# Altium PCB hat_template 2020V3.PcbDoc (part 1 of 2)
Units mm, origin at the board's own origin, x right, y up, seen from the top; angles counter-clockwise.
Board outline 64 x 85 mm, 4 copper layers (Top Side, Ground Plane, Power Plane, Bottom Side), stack 0.844 mm thick; 139 components, 78 nets, 419 pads, 123 vias.
Unrouted connection lines stored in the file: 3.
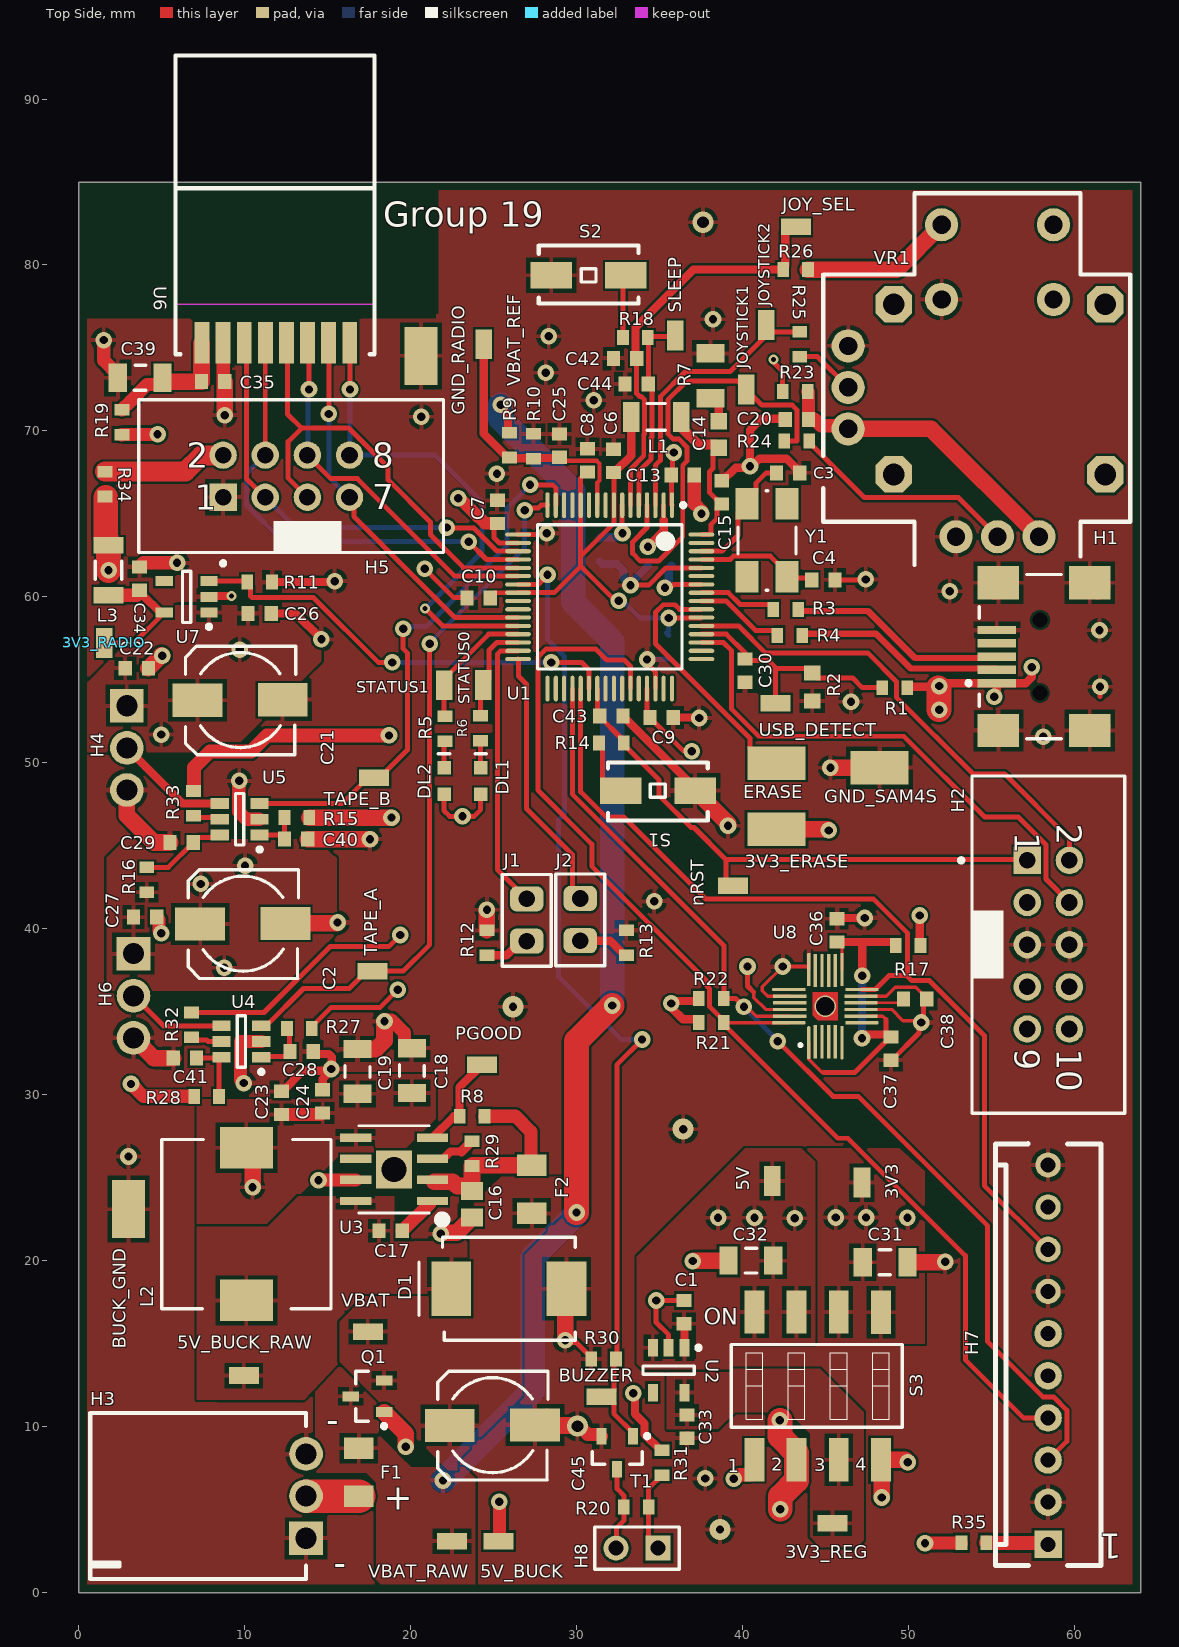
[diagram p0: Top Side view]
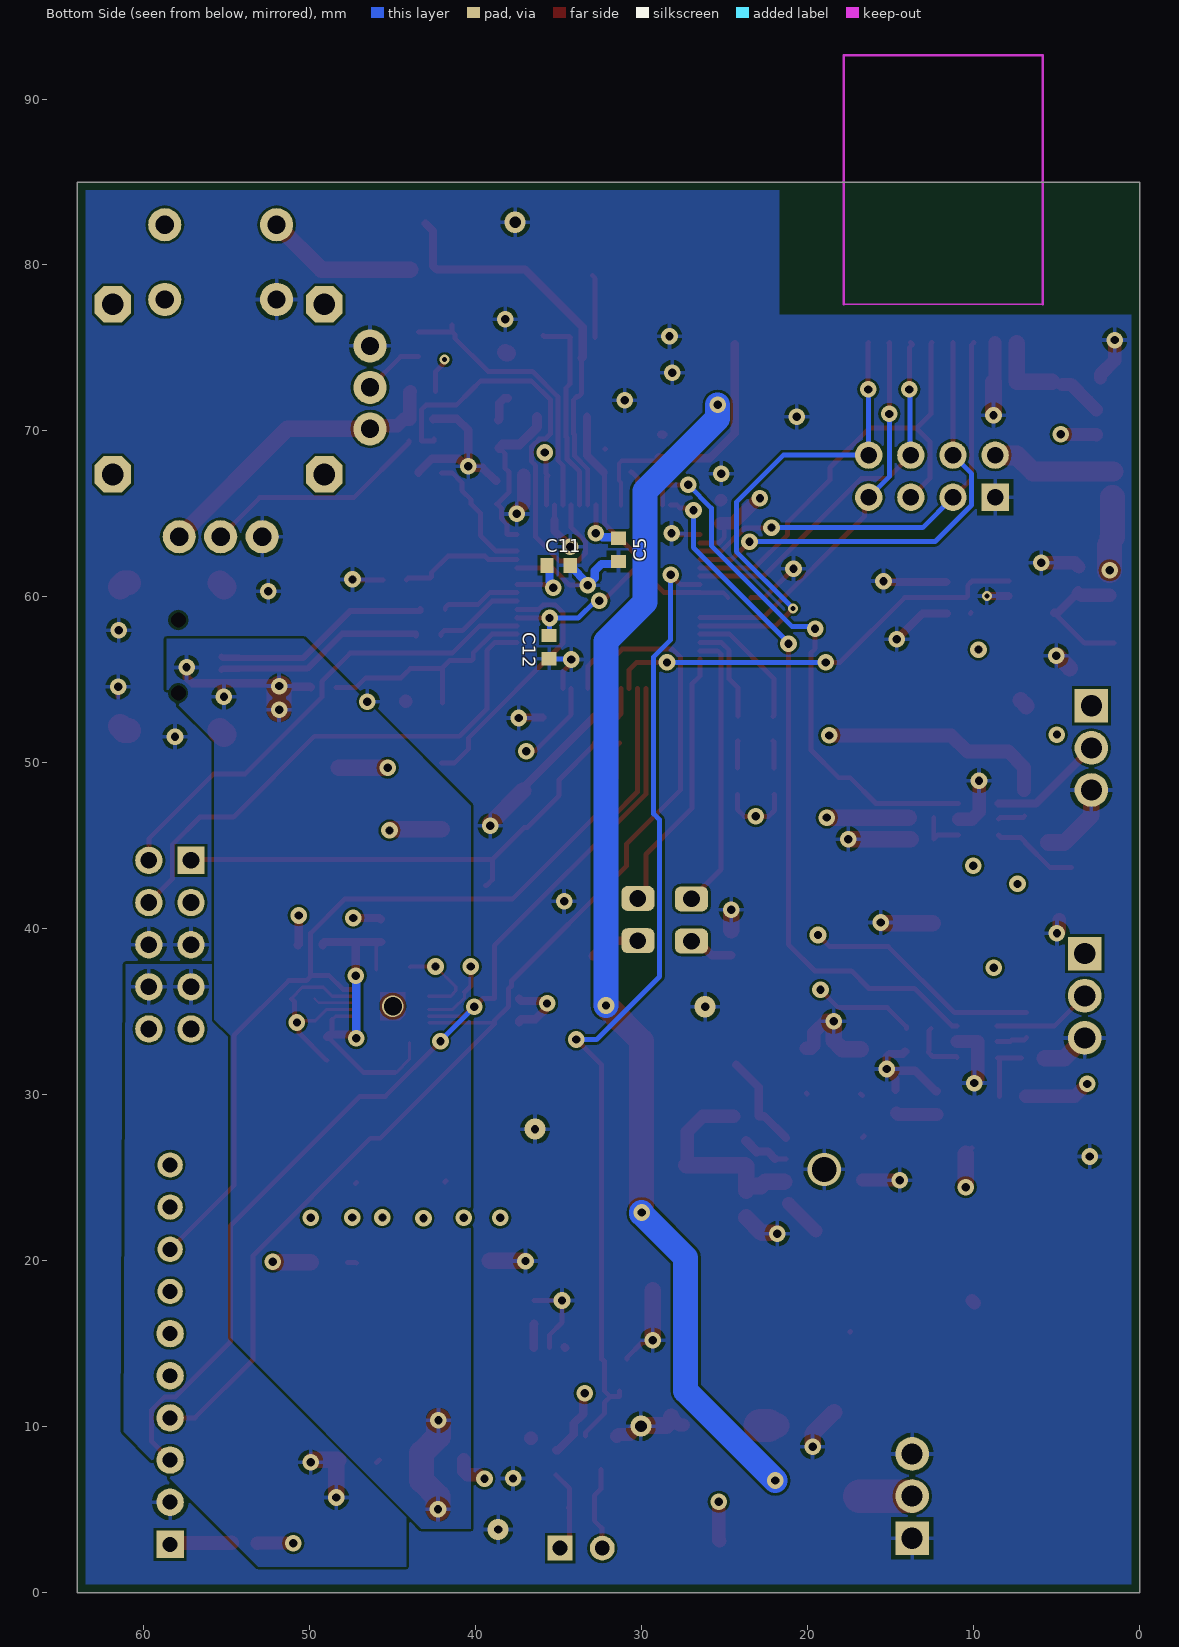
[diagram p1: Bottom Side view, seen from below]
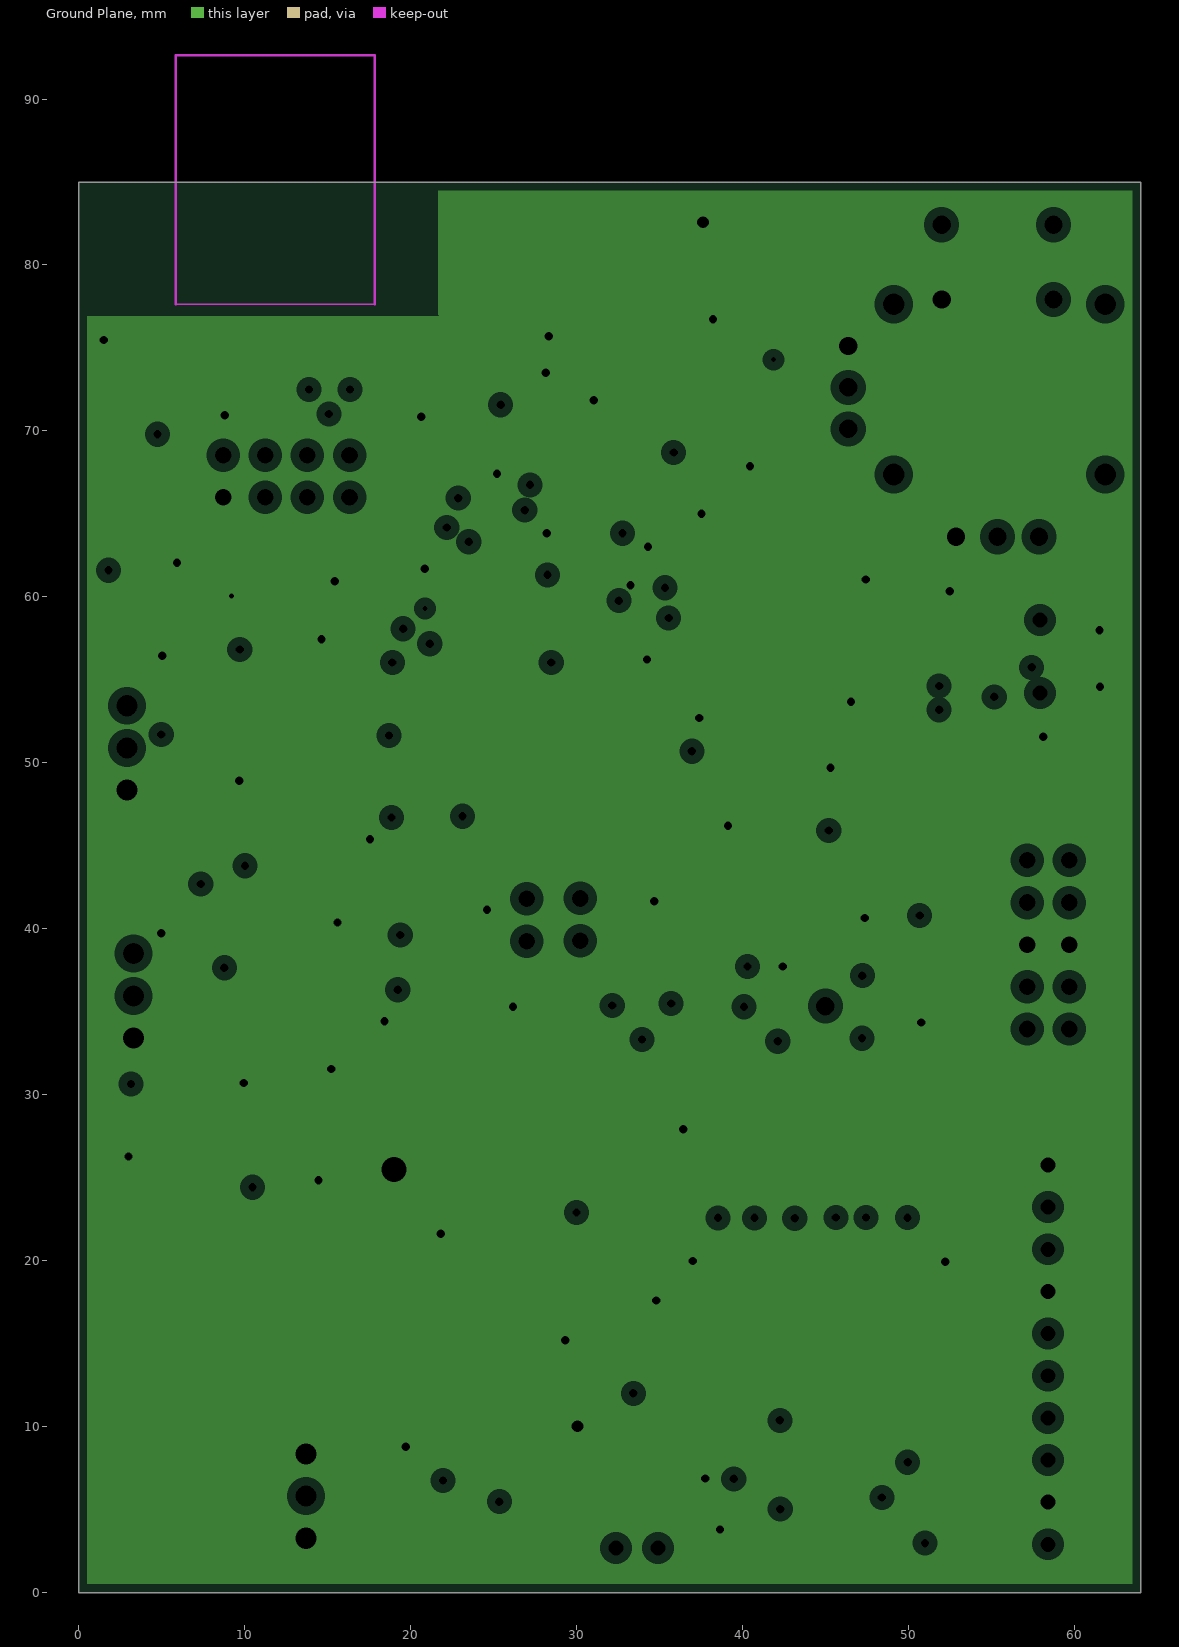
[diagram p2: Ground Plane, clearances drawn from the general rule]
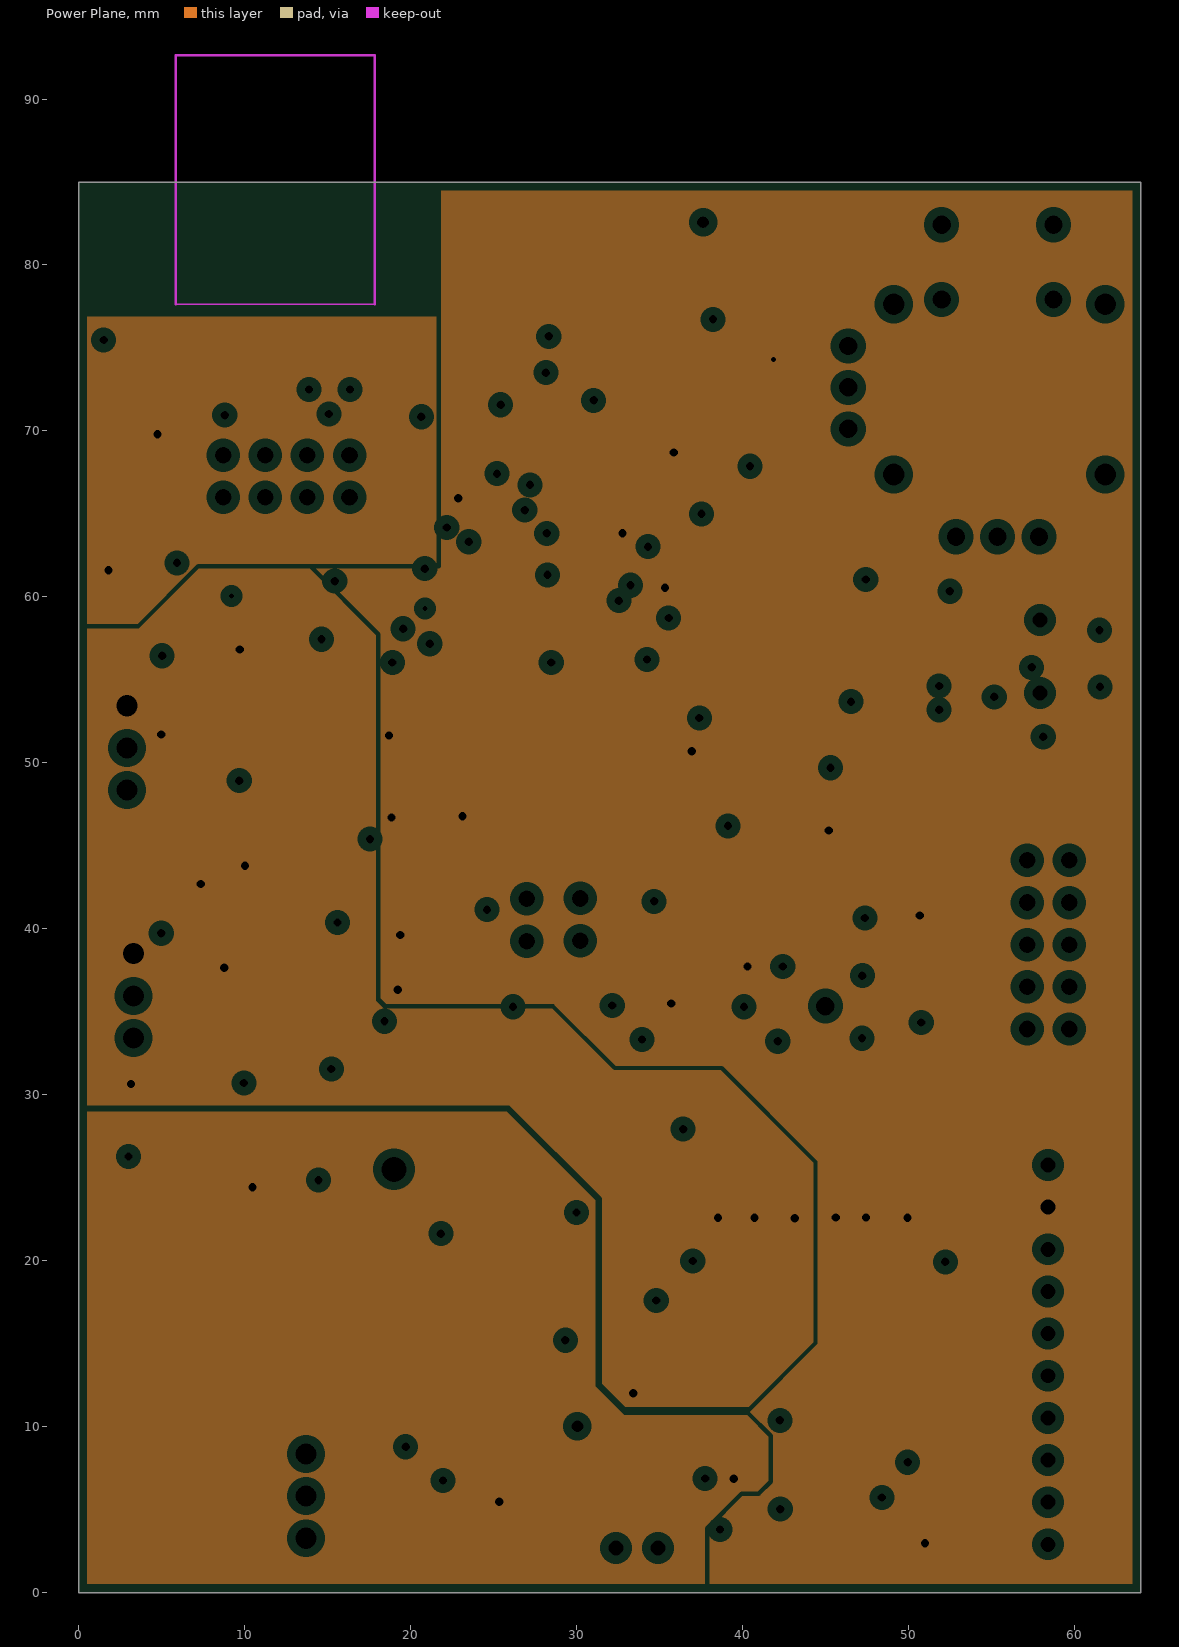
[diagram p3: Power Plane, clearances drawn from the general rule]

## Layer stack, top to bottom
Top Solder: solder mask 0.0102, Solder Resist, Dk 3.5
Top Side: signal copper 0.0356
Dielectric 1: core 0.32, FR-4, Dk 4.8
Ground Plane: plane copper 0.036, net GND
Dielectric 3: prepreg 0.127, Dk 4.2
Power Plane: plane copper 0.036, net (Multiple Nets)
Dielectric 4: core 0.254, Dk 4.2
Bottom Side: signal copper 0.0356
Bottom Solder: solder mask 0.0102, Solder Resist, Dk 3.5

## Board outline
0,85 64,85 64,0 0,0 0,85

## Design rules (kind name [scope] priority, off if disabled: settings)
BoardOutlineClearance [All] p1: gap=0.5 ignorepadtopadclearanceinfootprint=FALSE
Clearance Min_Clearance_Circuit_Labs [All] p1: gap=0.15 ignorepadtopadclearanceinfootprint=FALSE except(0: Arc-Hole Track-Hole SMDPad-Hole THPad-Hole Via-Hole Fill-Hole Poly-Hole Region-Hole Text-Hole)
DiffPairsRouting [All] p1: maxlimit=0.254 minlimit=0.254 mostfreqgap=0.254 toplayer_minwidth=0.381 toplayer_maxwidth=0.381 toplayer_prefwidth=0.381 bottomlayer_minwidth=0.381 bottomlayer_maxwidth=0.381 bottomlayer_prefwidth=0.381 maxuncoupledlength=12.7
FanoutControl Fanout_BGA [IsBGA] p1 off: bgadir=Out bgaviamode=Centered fanoutstyle=Auto fanoutdirection=Alternating viagrid=0.025 // Fanout_BGA (Default Rule)
HoleSize [All] p1: absolutevalues=TRUE maxlimit=10 minlimit=0.3 maxpercent=80.000 minpercent=20.000
MinimumAnnularRing [All] p1: minimumring=0.1
MinimumSolderMaskSliver [All] p1: minsoldermaskwidth=0.1
NetAntennae [All] p1: netantennaetolerance=1
PasteMaskExpansion [All] p1 off: expansion=0.2
PlaneClearance [All] p1: clearance=0.508
PlaneConnect [All] p1: planeconnectstyle=Relief reliefexpansion=0.508 reliefentries=4 reliefconductorwidth=0.254 reliefairgap=0.254
PolygonConnect [All] p1: connectstyle=Relief reliefconductorwidth=0.254 reliefentries=4 polygonreliefangle="90 Angle" airgapwidth=0.254
RoutingVias [All] p1: holewidth=0.5 width=1 viastyle="Through Hole" minholewidth=0.3 minwidth=0.6 maxholewidth=1 maxwidth=2
SMDNeckDown [All] p1 off: percent=50.000
SMDToCorner [All] p1: distance=98425
SMDToPlane [All] p1: distance=1968504
SilkToSolderMaskClearance SilkscreenOverComponentPads [IsPad] p1: minsilkscreentomaskgap=0.254 clearancetoexposedcopper=TRUE
SolderMaskExpansion [All] p1: expansion=0.102
ViasUnderSMD [All] p1: allowed=FALSE
Width [All] p1: maxlimit=2 minlimit=0.15 preferedwidth=0.3
21 further rules are at their usual default settings.

## Classes and differential pairs
component class U_SAM4S_MCU_Hat: 3V3_ERASE C2 C3 C4 C5 C6 C7 C8 C9 C10 C11 C12 C13 C14 C15 C21 C22 C25 C27 C28 C29 C30 C40 C41 C43 C44 DL1 DL2 ERASE GND_SAM4S H1 H2 H4 H6 J1 J2 L1 nRST R1 R2 R3 R4 R5 R6 R7 R9 R10 R12 R13 R14 R15 R16 R18 R27 R28 R32 R33 S1 S2 SLEEP STATUS0 STATUS1 TAPE_A TAPE_B U1 U4 U5 USB_DETECT VBAT_REF Y1
component class U_Radio: C35 C39 GND_RADIO H5 R19 R34
component class U_Joystick: C20 C42 JOY_SEL JOYSTICK1 JOYSTICK2 R23 R24 R25 R26 VR1
component class U_IMU_MPU-9250: C36 C37 C38 H7 R17 R21 R22 R35 U8
component class U_Buzzer: BUZZER H8 R20 R30 R31 T1
component class U_Battery_and_Power: 3V3 3V3_REG 5V 5V_BUCK 5V_BUCK_RAW BUCK_GND C1 C16 C17 C18 C19 C23 C24 C26 C31 C32 C33 C34 C45 D1 F1 F2 H3 L2 L3 PGOOD Q1 R8 R11 R29 S3 U2 U3 U7 VBAT VBAT_RAW
differential pair D: +D_P -D_N

## Components (designator, comment, footprint, x,y, rotation, side; value= is the part's Value field where it differs from the comment)
3V3 "TP_0603" TP_0603 47.2,24.7 r90 top
3V3_ERASE "3V3" TP_1206 42.05,46 r180 top value=TP
3V3_RADIO "TP_0603" TP_0603 1.55,57.225 r90 top
3V3_REG "TP_0603" TP_0603 45.425,4.175 r0 top
5V "TP_0603" TP_0603 41.8,24.8 r90 top
5V_BUCK "TP_0603" TP_0603 25.3,3.1 r0 top
5V_BUCK_RAW "TP_0603" TP_0603 9.95,13.075 r180 top
BUCK_GND "TP" TP_1206 3,23.1 r90 top
BUZZER "TP_0603" TP_0603 31.5,11.8 r0 top
C1 "1uF" CAPC1608L 36.475,16.9 r270 top
C2 "100uF/16V" NICH-1 9.9,40.3 r180 top
C3 "27pF" CAPC1608L 42.75,67.475 r180 top
C4 "27pF" CAPC1608L 44.875,61.025 r180 top
C5 "100nF" CAPC1608L 31.4,62.825 r90 bottom
C6 "100nF" CAPC1608L 32.225,68.2 r90 top
C7 "100nF" CAPC1608L 25.225,65.125 r270 top
C8 "100nF" CAPC1608L 30.65,68.225 r90 top
C9 "100nF" CAPC1608L 35.125,52.725 r180 top
C10 "100nF" CAPC1608L 24.1,59.925 r180 top
C11 "100nF" CAPC1608L 35,61.9 r0 bottom
C12 "100nF" CAPC1608L 35.575,56.975 r270 bottom
C13 "100nF" CAPC1608L 36.4,67.35 r180 top
C14 "4.7uF" CAPC1608N 38.575,69.775 r270 top
C15 "100nF" CAPC1608L 38.75,66.3 r90 top
C16 "10uF" CAPC2012L 23.7,23.4 r90 top
C17 "100nF" CAPC1608L 18.8,21.8 r180 top
C18 "22uF" CAPC3216L 20.075,31.45 r270 top
C19 "22uF" CAPC3216L 16.8,31.4 r270 top
C20 "100nF" CAPC1608L 43.275,70.7 r0 top
C21 "100uF/16V" NICH-1 9.739,53.778 r180 top
C22 "100nF" CAPC1608L 3.5,55.7 r180 top
C23 "100nF" CAPC1608L 12.225,29.5 r270 top
C24 "10nF" CAPC1608L 14.7,29.6 r270 top
C25 "100nF" CAPC1608L 28.973,69.113 r270 top
C26 "1uF" CAPC1608L 10.9,59 r180 top
C27 "100nF" CAPC1608L 4,40.7 r180 top
C28 "100nF" CAPC1608L 13.425,32.6 r180 top
C29 "100nF" CAPC1608L 6.2,45.2 r0 top
C30 "100nF" CAPC1608L 40.15,55.55 r90 top
C31 "22uF" CAPC3216L 48.6,19.9 r180 top
C32 "22uF" CAPC3216L 40.5,20 r0 top
C33 "2.2uF" CAPC1608L 36.65,10 r90 top
C34 "2.2uF" CAPC1608L 3.65,61.1 r270 top
C35 "100nF" CAPC1608L 8.1,72.975 r180 top
C36 "100nF" CAPC1608L 45.7,39.9 r90 top
C37 "10nF" CAPC1608L 48.95,32.775 r270 top
C38 "100nF" CAPC1608L 50.4,35.775 r180 top
C39 "22uF" CAPC3216L 3.7,73.2 r0 top
C40 "100nF" CAPC1608L 13.1,45.4 r180 top
C41 "100nF" CAPC1608L 6.4,32.2 r0 top
C42 "100nF" CAPC1608L 32.925,74.375 r0 top
C43 "100nF" CAPC1608L 32.1,52.825 r180 top
C44 "100nF" CAPC1608L 33.625,72.825 r0 top
C45 "100uF/16V" NICH-1 24.939,10.078 r180 top
D1 "#NAME?" SMC 25.925,18.3 r180 top
DL1 "#NAME?" WL-SMCW0603 24.225,49.7 r270 top
DL2 "#NAME?" WL-SMCW0603 22.025,49.7 r270 top
ERASE "Erase" TP_1206 42.05,49.975 r0 top value=TP
F1 "10A" RESC3216N 16.875,7.25 r90 top
F2 "2A" RESC3216N 27.3,24.3 r90 top
GND_RADIO "TP" TP_1206 20.625,74.525 r270 top
GND_SAM4S "TP" TP_1206 48.25,49.7 r180 top
H1 "JS_USB_MINI_B" USB/SM0.8-6H5 63.175,56.4 r0 top
H2 "Header 5X2 Vert" IDC2.54-V10D 58.43,39.04 r270 top
H3 "Battery_HEADER_3pin" BATT_HEADER_3POS 13.7,5.81 r90 top
H4 "HEADER_3" HEADER_3POS 2.9,50.9 r270 top
H5 "JA_HDR_IDC_4x2_VERT" IDC2.54-V08D 13.78,67.27 r0 top
H6 "HEADER_3" HEADER_3POS 3.3,35.96 r270 top
H7 "External IMU" MOLEX_KK_10_HDR 58.417,2.904 r90 top
H8 "Header 2" HDR1X2 34.915,2.675 r180 top
J1 "100Mil Jumper" JMP2.54 27,41.8 r270 top
J2 "100Mil Jumper" JMP2.54 30.225,41.825 r270 top
JOY_SEL "TP_0603" TP_0603 43.225,82.3 r0 top
JOYSTICK1 "TP_0603" TP_0603 40.225,72.5 r270 top
JOYSTICK2 "TP_0603" TP_0603 41.425,76.375 r90 top
L1 "1A max, Idc 0.3R," INDC3216L 34.8,70.85 r180 top
L2 "IND 5.2UH 6A" INDUCTOR5u2 10.1,22.2 r90 top
L3 "1A max, Idc 0.3R" INDC3216L 1.8,61.6 r90 top
nRST "TP_0603" TP_0603 39.425,42.6 r180 top
PGOOD "TP_0603" TP_0603 24.3,31.8 r0 top
Q1 "#NAME?" SOT23_L 17.4,11.825 r180 top
R1 "27K" RESC1608L 49.175,54.525 r0 top
R2 "47K" RESC1608N 44.2,54.575 r90 top
R3 "27R" RESC1608L 42.6,59.25 r180 top
R4 "27R" RESC1608L 42.85,57.675 r180 top
R5 "1K" RESC1608L 22.075,52.05 r270 top
R6 "1K6" RESC1608L 24.2,52.075 r270 top
R7 "1R" RESC3216L 38.075,73.325 r270 top
R8 "100K" RESC1608L 23.7,28.7 r0 top
R9 "16K" RESC1608L 25.95,69.15 r90 top
R10 "10K" RESC1608L 27.4,69.069 r270 top
R11 "10K" RESC1608L 10.9,60.9 r180 top
R12 "3K" RESC1608L 24.6,39.15 r90 top
R13 "3K" RESC1608L 33,39.15 r90 top
R14 "3K" RESC1608L 32.1,51.2 r180 top
R15 "0R" RESC1608L 13.15,46.7 r180 top
R16 "0R" RESC1608L 4.1,42.95 r270 top
R17 "0R" RESC1608L 49.975,39 r0 top
R18 "3K" RESC1608L 33.55,75.625 r180 top
R19 "0R" RESC1608L 2.6,70.525 r270 top
R20 "1K" RESC1608L 33.6,5.15 r0 top
R21 "4K7" RESC1608L 38.125,34.35 r180 top
R22 "4K7" RESC1608L 38.125,35.8 r180 top
R23 "0R" RESC1608L 43.175,72.375 r180 top
R24 "3K" RESC1608L 43.275,69.4 r0 top
R25 "3K" RESC1608L 43.45,75.225 r90 top
R26 "3K" RESC1608L 43.2,79.725 r0 top
R27 "0R" RESC1608L 13.3,34 r180 top
R28 "0R" RESC1608L 7.7,29.9 r180 top
R29 "0R" RESC1608L 23.7,26.45 r270 top
R30 "4K7" RESC1608L 31.625,14.075 r0 top
R31 "0R" RESC1608L 35.15,7.825 r270 top
R32 "0R" RESC1608L 6.8,34.2 r90 top
R33 "0R" RESC1608L 6.925,47.55 r90 top
R34 "0R" RESC1608L 1.575,66.8 r270 top
R35 "0R" RESC1608L 53.95,3 r180 top
S1 "EVQPNF05M" EVQPNF05M 34.9,48.325 r180 top
S2 "EVQPNF05M" EVQPNF05M 30.725,79.375 r0 top
S3 "WS_SW DIP-4" "DIP_SW_4WAY_SMD -" 40.72,8 r0 top
SLEEP "TP_0603" TP_0603 35.95,75.75 r90 top
STATUS0 "TP_0603" TP_0603 24.375,54.7 r90 top
STATUS1 "TP_0603" TP_0603 22.025,54.675 r90 top
T1 "#NAME?" SOT23_L 32.45,8.425 r270 top
TAPE_A "TP_0603" TP_0603 17.7,37.45 r180 top
TAPE_B "TP_0603" TP_0603 17.8,49.1 r0 top
U1 "ATSAM4S8BA-ANR" LQFP64_L 32,60 r270 top locked
U2 "#NAME?" SOT95P280X145-5N 35.55,13.4 r270 top
U3 "ADP2302ARDZ-5.0 BUCK" RD_8_1 19,25.5 r180 top locked value=Value
U4 "SN74LVC1T45" SOT23-6_N 9.8,33.2 r180 top
U5 "SN74LVC1T45" SOT23-6_N 9.7,46.6 r180 top
U6 "nRF24 SMD" NRF24 5.832,74.625 r0 top
U7 "#NAME?" SOT95P280X145-5N 6.5,60 r180 top
U8 "MPU-9250" QUAD24 43.993,33.985 r90 top locked
USB_DETECT "TP_0603" TP_0603 42,53.6 r180 top
VBAT "TP_0603" TP_0603 17.425,15.725 r0 top
VBAT_RAW "TP_0603" TP_0603 22.5,3.1 r0 top
VBAT_REF "TP_0603" TP_0603 24.4,75.225 r90 top
VR1 "Joystick 10k with Sw" Joystick_Sw 55.37,63.625 r270 top
Y1 "12MHz" 6.0X3.5-4 41.475,63.4 r90 top

## Footprints (in the part's own frame and the unit in brackets; to place one, negate y for a bottom-side part, rotate by r counter-clockwise, add the part's x,y. Pads: shape width x height; smd on the part's side, far side on the other; paste and mask are expansions set on the pad)
6.0X3.5-4 [mm] "4 SMD 6.0X3.5 mm No Lead Crystal"
  rect 1.9x1.4 smd: 1(-2.2,-1.2) 2(2.2,-1.2) 3(2.2,1.2) 4(-2.2,1.2)
  silkscreen extent -3,-1.75 3,1.75, body extent -3,-1.75 3,1.75, height 1.2
BATT_HEADER_3POS [mil]
  rect 80x80 hole 50: 1(-100,0)
  round 80 hole 50: 2(0,0) 3(100,0)
  silkscreen extent -197,0 197,512
CAPC1608L [mm] "Chip Capacitor, Body 1.6x0.8mm, IPC High Density"
  rect 0.8x0.9 smd: 1(-0.7,0) 2(0.7,0)
  body extent -0.87,-0.48 0.87,0.48, height 0.85
CAPC1608N [mm] "Chip Capacitor, Body 1.6x0.8mm, IPC Medium Density"
  rect 1x1 smd: 1(-0.8,0) 2(0.8,0)
  body extent -0.87,-0.48 0.87,0.48, height 0.85
CAPC2012L [mm] "Chip Capacitor, Body 2.0x1.3mm, IPC High Density"
  rect 1.1x1.3 smd: 1(-0.8,0) 2(0.8,0)
  body extent -1.1,-0.72 1.1,0.72, height 1.1
CAPC3216L [mm] "Chip Capacitor, Body 3.2x1.6mm, IPC High Density"
  rect 1.1x1.7 smd: 1(-1.35,0) 2(1.35,0)
  silkscreen extent -0.35,-0.75 0.35,0.75, body extent -1.7,-0.9 1.7,0.9, height 1.35
"DIP_SW_4WAY_SMD -" [mm] "DIP Switch; 8 Leads"
  rect 1.2x2.6 smd: 1(0,0) 2(2.54,0) 3(5.08,0) 4(7.62,0) 5(7.62,8.89) 6(5.08,8.9) 7(2.54,8.9) 8(0,8.9)
  silkscreen extent -1.4,1.95 8.9,6.95
EVQPNF05M [mm] "Panansonic light touch SMD push button switch"
  rect 2.5x1.6 smd: 1(-2.25,0) 2(2.25,0)
  silkscreen extent -3,-1.7 3,1.8, body extent -3,-1.7 3,1.8, height 5
HDR1X2 [mm] "Connector; Header; 2 Position"
  rect 1.5x1.5 hole 0.9: 1(0,0)
  round 1.5 hole 0.9: 2(2.54,0)
  silkscreen extent -1.27,-1.27 3.81,1.27
HEADER_3POS [mil]
  rect 80x80 hole 50: 1(-100,0)
  round 80 hole 50: 2(0,0) 3(100,0)
IDC2.54-V08D [mm] "Connector; IDC, Low Profile Male Header, Thru-Hole; 10 Position; Vertical; Pitch 2.54 mm; Body 20.32 x 9.2 x 9.45 mm (LxWxH)"
  rect 1.65x1.65 hole 1: 1(-5.08,-1.27)
  round 1.65 hole 1: 2(-5.08,1.27) 3(-2.54,-1.27) 4(-2.54,1.27) 5(0,-1.27) 6(0,1.27) 7(2.54,-1.27) 8(2.54,1.27)
  silkscreen extent -10.16,-5.37 8.2,4.6, body extent -9.97,-4.4 7.4,4.87, height 9.39
IDC2.54-V10D [mm] "Connector; IDC, Low Profile Male Header, Thru-Hole; 10 Position; Vertical; Pitch 2.54 mm; Body 20.32 x 9.2 x 9.45 mm (LxWxH)"
  rect 1.65x1.65 hole 1: 1(-5.08,-1.27)
  round 1.65 hole 1: 2(-5.08,1.27) 3(-2.54,-1.27) 4(-2.54,1.27) 5(0,-1.27) 6(0,1.27) 7(2.54,-1.27) 8(2.54,1.27) 9(5.08,-1.27) 10(5.08,1.27)
  silkscreen extent -10.16,-5.37 10.16,4.6, body extent -10.16,-4.6 10.16,4.6, height 9.45
INDC3216L [mm] "Chip Inductor, Body 3.2x1.6mm, IPC High Density"
  rect 1x1.8 smd: 1(-1.5,0) 2(1.5,0)
  silkscreen extent -0.55,-0.8 0.55,0.8, body extent -1.75,-0.95 1.75,0.95, height 1.9
INDUCTOR5u2 [mm]
  rect 2.5x3.2 smd: 1(-4.6,0) 2(4.6,0)
  silkscreen extent -5.1,-5.1 5.1,5.1
JMP2.54 [mm] "Jumper Change over 2.54mm"
  rrect50% 1.5x2 hole 1: 1(0,0) 2(2.544,0)
  silkscreen extent -1.47,-1.47 4.05,1.47, body extent -1.43,-1.43 4.05,1.43, height 8.45
Joystick_Sw [mm]
  round 2 hole 1.1: 1(0,2.5) 2(0,0) 3(0,-2.5) 4(-6.5,-9) 5(-9,-9) 6(-11.5,-9) 7(-14.3,-3.37) 8(-18.8,-3.37) 9(-18.8,3.37) 10(-14.3,3.37)
  oct 2.2x2.2 hole 1.3: 11(-14,-6.25) 12(-3.75,-6.25) 13(-14,6.5) 14(-3.75,6.5)
  silkscreen extent -20.7,-10.5 1.7,8
LQFP64_L [mm] "Thin QFP, 64-Leads, Body 10x10mm, Pitch 0.5mm, IPC High Density"
  oval 1.55x0.25 smd mask+0.07: 1(-5.525,3.75) 2(-5.525,3.25) 3(-5.525,2.75) 4(-5.525,2.25) 5(-5.525,1.75) 6(-5.525,1.25) 7(-5.525,0.75) 8(-5.525,0.25) 9(-5.525,-0.25) 10(-5.525,-0.75) 11(-5.525,-1.25) 12(-5.525,-1.75) 13(-5.525,-2.25) 14(-5.525,-2.75) 15(-5.525,-3.25) 16(-5.525,-3.75) 33(5.525,-3.75) 34(5.525,-3.25) 35(5.525,-2.75) 36(5.525,-2.25) 37(5.525,-1.75) 38(5.525,-1.25) 39(5.525,-0.75) 40(5.525,-0.25) 41(5.525,0.25) 42(5.525,0.75) 43(5.525,1.25) 44(5.525,1.75) 45(5.525,2.25) 46(5.525,2.75) 47(5.525,3.25) 48(5.525,3.75)
  oval 0.25x1.55 smd mask+0.07: 17(-3.75,-5.525) 18(-3.25,-5.525) 19(-2.75,-5.525) 20(-2.25,-5.525) 21(-1.75,-5.525) 22(-1.25,-5.525) 23(-0.75,-5.525) 24(-0.25,-5.525) 25(0.25,-5.525) 26(0.75,-5.525) 27(1.25,-5.525) 28(1.75,-5.525) 29(2.25,-5.525) 30(2.75,-5.525) 31(3.25,-5.525) 32(3.75,-5.525) 49(3.75,5.525) 50(3.25,5.525) 51(2.75,5.525) 52(2.25,5.525) 53(1.75,5.525) 54(1.25,5.525) 55(0.75,5.525) 56(0.25,5.525) 57(-0.25,5.525) 58(-0.75,5.525) 59(-1.25,5.525) 60(-1.75,5.525) 61(-2.25,5.525) 62(-2.75,5.525) 63(-3.25,5.525) 64(-3.75,5.525)
  silkscreen extent -5.65,-4.35 4.35,4.55, body extent -5,-5 5,5, height 1.6
MOLEX_KK_10_HDR [mil] "MOLEX_KK_10_HDR"
  rect 65x65 hole 35.43: 1(0,0)
  round 65 hole 35.43: 2(100,0) 3(200,0) 4(300,0) 5(400,0) 6(500,0)
  round 60 hole 35.43: 7(600,0) 8(700,0) 9(800,0) 10(900,0)
  silkscreen extent -50,-125 951,125, body extent -44,-120 944,120, height 630
NICH-1 [mm] "Electrolytic capacitor"
  rect 3x2 smd: 1(-2.561,-0.022) 2(2.584,0.011)
  silkscreen extent -3.34,-3.25 3.3,3.3, body extent -3.2,-3.2 3.2,3.2, height 5.3
NRF24 [mm]
  rect 0.9x2.5 smd: 1(1.6,0.7) 2(2.871,0.7) 3(4.143,0.7) 4(5.414,0.7) 5(6.686,0.7) 6(7.957,0.7) 7(9.229,0.7) 8(10.5,0.7)
  Keep-Out Layer lines w0.1: 0,3 12,3
  Keep-Out Layer lines w0.15: 0,3 0,18 12,18 12,3
  silkscreen extent 0,0 12,18
QUAD24 [mm]
  oval 2x0.2 smd paste+0.02 mask+0.015: 1(-0.85,0)
  rect 2x0.2 smd paste+0.02 mask+0.015: 2(-0.8,-0.4) 3(-0.8,-0.8) 4(-0.8,-1.2) 5(-0.8,-1.6) 14(3.5,-1.6) 15(3.5,-1.2) 16(3.5,-0.8) 17(3.5,-0.4)
  rrect50% 2x0.2 smd paste+0.02 mask+0.015: 6(-0.85,-2) 13(3.55,-2) 18(3.55,0)
  rrect50% 0.2x2 smd paste+0.02 mask+0.015: 7(0.35,-3.2) 12(2.35,-3.2) 19(2.35,1.2) 24(0.35,1.2)
  rect 0.2x2 smd paste+0.02 mask+0.015: 8(0.75,-3.15) 9(1.15,-3.15) 10(1.55,-3.15) 11(1.95,-3.15) 20(1.95,1.15) 21(1.55,1.15) 22(1.15,1.15) 23(0.75,1.15)
  Top Side region: 0.5,-1.75 0.5,-0.55 0.8,-0.25 2.2,-0.25 2.2,-1.75
  silkscreen extent -1.05,0.45 -0.95,0.55
RD_8_1 [mil]
  rect 74x20 smd paste+0 mask+0: 1(-91,75) 2(-91,25) 3(-91,-25) 4(-91,-75) 5(91,-75) 6(91,-25) 7(91,25) 8(91,75)
  rect 84.65x90 smd paste-44.5 mask+0: EPAD(0,0)
  silkscreen extent -118,-103 84,123, body extent 0,0 10,10, height 10
RESC1608L [mm] "Chip Resistor, Body 1.6x0.8mm, IPC High Density"
  rect 0.7x0.9 smd: 1(-0.75,0) 2(0.75,0)
  body extent -0.85,-0.48 0.85,0.48, height 0.9
RESC1608N [mm] "Chip Resistor, Body 1.6x0.8mm, IPC Medium Density"
  rect 0.9x1 smd: 1(-0.85,0) 2(0.85,0)
  body extent -0.85,-0.48 0.85,0.48, height 0.6
RESC3216L [mm] "Chip Resistor, Body 3.1x1.6mm, IPC High Density"
  rect 1.1x1.7 smd: 1(-1.35,0) 2(1.35,0)
  body extent -1.68,-0.87 1.68,0.87, height 2.54
RESC3216N [mm] "Chip Resistor, Body 3.2x1.6mm, IPC Medium Density"
  rect 1.3x1.8 smd: 1(-1.45,0) 2(1.45,0)
  body extent -1.68,-0.87 1.68,0.87, height 0.71
SMC [mm] "DO-214-AB/SMC; 2 C-Bend Leads; Body 7.9 x 5.9 mm, inc. leads (LxW)"
  rect 2.4x3.3 smd: 1(-3.475,0) 2(3.475,0)
  silkscreen extent -4,-3.1 5.42,3.1
SOT23-6_N [mm]
  rect 1.1x0.65 smd: 1(-1.2,0.95) 2(-1.2,0) 3(-1.2,-0.95) 4(1.2,-0.95) 5(1.2,0) 6(1.2,0.95)
  silkscreen extent -1.33,-1.55 0.25,1.95, body extent -0.9,-1.55 0.9,1.55, height 1.45
SOT23_L [mm] "SOT23, 3-Leads, Body 2.9x1.3mm, Pitch 0.95mm, Lead Span 2.3mm, IPC High Density"
  rect 1x0.6 smd: 1(-1,0.95) 2(-1,-0.95) 3(1,0)
  silkscreen extent -1.13,-1.5 0.7,1.92, body extent -0.7,-1.5 0.7,1.5, height 1.1
SOT95P280X145-5N [mm] "SOT23, 5-Leads, Body 2.90x2.80mm, Pitch 0.95mm, IPC Medium Density"
  rect 1.05x0.6 smd: 1(-1.35,0.95) 2(-1.35,0) 3(-1.35,-0.95) 4(1.35,-0.95) 5(1.35,0.95)
  silkscreen extent -1.47,-1.55 0.25,1.93, body extent -0.87,-1.52 0.87,1.53, height 1.45
TP_0603 [mm] "TestPoint 0603"
  rect 1.8x1 smd: 1(0,0)
  body extent -1,-0.6 1,0.6, height 0.9
TP_1206 [mm] "Test Point Pad"
  rect 3.5x2 smd: 1(0,0)
  body extent -1.62,-0.85 1.63,0.8, height 2
USB/SM0.8-6H5 [mm] "Connector; USB2.0, Type B, SM; 5 Position; Right Angle"
  rect 2.3x0.5 smd mask+0.07: 1(-7.85,-1.6) 2(-7.85,-0.8) 3(-7.85,0) 4(-7.85,0.8) 5(-7.85,1.6)
  rect 2.5x2 smd: 6(-7.75,4.45) 7(-2.25,4.45) 8(-7.75,-4.45) 9(-2.25,-4.45)
  round 0.6 hole 0.9 unplated: MH1(-5.25,2.2) MH2(-5.25,-2.2)
  silkscreen extent -9.67,-4.95 -3.95,4.95, body extent -8.9,-4.95 0.7,4.95, height 3.9
WL-SMCW0603 [mm] "2.4 x 0.8 x 0.7mm LED"
  rect 0.8x0.8 smd: 1(0,0) 2(1.6,0)
  silkscreen extent -0.85,-0.35 -0.85,0.35

## Part data
3V3 3V3_RADIO 3V3_REG 5V 5V_BUCK 5V_BUCK_RAW BUZZER JOY_SEL JOYSTICK1 JOYSTICK2 nRST PGOOD SLEEP STATUS0 STATUS1 TAPE_A TAPE_B USB_DETECT VBAT VBAT_RAW VBAT_REF: "Test Point 1.65X0.9X1.2mm SMD", Manufacturer="TE Connectivity AMP Connectors", Manufacturer Part Number=1625854-3, Supplier Part Number 1=A106145CT-ND, Mounting Type="Surface Mount", Supplier 1=Digi-Key, Terminal="0.063\" x 0.031\" x 0.045\" (1.60mm x 0.80mm x 1.15mm)", Type="PC Test Point"
3V3_ERASE BUCK_GND ERASE GND_RADIO GND_SAM4S: library part TP_1206, "Test-Point 3.3x1.6x2.1mm SMD", Manufacturer="Harwin Inc", Manufacturer Part Number=S1751-46R, Supplier Part Number 1=952-1478-2-ND, Mounting Type="Surface Mount", Storage Location=ProtoPlace, Supplier="ECE Dept", Supplier 1=Digi-Key, Supplier 2=Farnell, Supplier Part Number 2=1826282, Type="PC Test Point"
C1 C26: library part CC_1uF_0603, "CAP CER 1uF Y5V -20% +80% 16V 0603", Max Voltage=16V, Code_IPC="1608 [0603]", PackageReference=0603, Storage Location="PCB Assembly WS", Supplier="ECE Dept"
C2 C21 C45: library part CA_100uF_16V, "CAP ALUM 100uF 16V SMD", Manufacturer=Nichcon, Manufacturer PN=UWX1C101MCL1GB, Supplier Part Number 1=1870677, Storage Location="PCB Assembly WS", Supplier="ECE Dept", Supplier 1=Farnell, Supplier 2=Digi-Key, Supplier Part Number 2=493-2105-1-ND
C3 C4: library part CC_27pF_0603, "CAP CER 27pF NPO/COG +-5% 50V 0603", Code_IPC="1608 [0603]", PackageReference=0603, Storage Location="PCB Assembly WS", Supplier="ECE Dept"
C5 C6 C7 C8 C9 C10 C11 C12 C13 C15 C17 C20 C22 C23 C25 C27 C28 C29 C30 C35 C36 C38 C40 C41 C42 C43 C44: library part CC_100nF_0603, "CAP CER 100nF X7R +-10% 50V 0603", Code_IPC="1608 [0603]", PackageReference=0603, Storage Location="PCB Assembly WS", Supplier="ECE Dept"
C14: library part CC_4.7uF_0603, "CAP CER 4.7uF X5R +-20%  10V 0603", Max Voltage=10V, Code_IPC=2012[0805], Note="Footprint corresponds to dimensions for bulk cassette packaging. This case size has tightened tolerances.", PackageReference=0805, Storage Location="PCB Assembly WS", Supplier="ECE Dept"
C16: library part CC_10uF_0805_10V, "CAP CER 10uF X7R +-20% 10V 0805", Max Voltage=10V, Code_IPC=2012[0805], Note="Footprint corresponds to dimensions for bulk cassette packaging. This case size has tightened tolerances.", PackageReference=0805, Storage Location="PCB Assembly WS", Supplier="ECE Dept"
C18 C19 C31 C32 C39: library part CC_22uF_1206, "CAP CER 22uF Y5V -20% +80% 10V 1206", Dielectric=Y5V, Max Voltage=10V, Storage Location="PCB Assembly WS", Supplier="ECE Dept"
C24 C37: library part CC_10nF_0603, "CAP CER 10nF X7R +-10% 50V 0603", Code_IPC="1608 [0603]", PackageReference=0603, Storage Location="PCB Assembly WS", Supplier="ECE Dept"
C33 C34: library part CC_2.2uF_0603, "CAP CER 2.2uF X5R +-20% 10V 0603", Max Voltage=10V, Code_IPC="1608 [0603]", PackageReference=0603, Storage Location="PCB Assembly WS", Supplier="ECE Dept"
D1: library part DS_VS-30BQ015-M3, "DIODE, SCHOTTKY, 3A, 15V, DO-214AB / SMC", Average Rectified Current=3A, Forward Voltage=350mV, Manufacturer="Vishay Semiconductors", Manufacturer Part Number=VS-30BQ015-M3/9AT, Max Forward Surge Current (Ifsm)=650A, Max Reverse Voltage (DC)=15V, Peak Reverse Current=4mA, Supplier Part Number=VS-30BQ015-M3/9AT-ND, Supplier Part Number 1=VS-30BQ015-M3/9ATGIDKR-ND, ComponentLink1Description=https://datasheet.ciiva.com/36181/vs-30bq015-m3-9at-36181258.pdf, ComponentLink1URL=https://datasheet.ciiva.com/36181/vs-30bq015-m3-9at-36181258.pdf, Supplier=Digi-Key, Supplier 1=Digi-Key, Supplier 2=Element14, Supplier Part Number 2=2628288
DL1: library part DL_150060RS75000, "LED Red 250mcd 0603 SMD", Forward Current If=30, Forward Voltage=2, LED Colour=Red, Manufacturer="WURTH ELEKTRONIK", Manufacturer Part Number=150060RS75000, Supplier Part Number 1=2322071, LED Mounting=SMD, Lens Shape=Rectangular, Luminous Intensity=250, Storage Location="PCB Assembly WS", Supplier="ECE Dept", Supplier 1=Farnell, Viewing Angle=140°, Wavelength Typ=625
DL2: library part DL_150060GS75000, "LED Dk Green 430mcd 0603 SMD", Forward Current If=30, Forward Voltage=3.2, LED Colour="Dark Green", Manufacturer="WURTH ELEKTRONIK", Manufacturer Part Number=150060GS75000, Supplier Part Number 1=2322070, LED Mounting=SMD, Lens Shape=Rectangular, Luminous Intensity=430, Storage Location="PCB Assembly WS", Supplier="ECE Dept", Supplier 1=Farnell, Viewing Angle=140°, Wavelength Typ=520
F1: library part FS_Fuse_10A, "Fuse 10A Fast Acting 1206 SMD", Fuse Case Style=1206, Fuse Current=10, Manufacturer="Eaton Bussmann", Manufacturer Part Number=TR/3216FF10-R, Supplier Part Number 1=TR/3216FF10-R-ND, Voltage Rating (AC)=32V, Voltage Rating (DC)=24V, Blow Characteristic="Fast Acting", Current Rating=10A, Device Marking=10, Fuse Type Blowing Characteristic="Fast Acting", Storage Location="PCB Assembly WS", Supplier="ECE Dept", Supplier 1=Digi-Key, Supplier 2=Farnell, Supplier Part Number 2=1717117
F2: library part FS_Fuse_2.0A, "Fuse 2.0A Very Fast Acting 1206 SMD", Manufacturer=MULTICOMP, Manufacturer Part Number="MC12CF 002", Supplier Part Number 1=1841029, Manufacturer PN="MC12CF 002", Storage Location="PCB Assembly WS", Supplier="ECE Dept", Supplier 1=Farnell
H1: library part JS_USB_MINI_B_SMT, "USB 2.0, Right Angle, SMT, B Type, Receptacle, 5 Position,", Manufacturer=FCI, Manufacturer PN=10033526-N3212MLF, Supplier Part Number 1=1824416, Storage Location="PCB Assembly WS", Supplier="ECE Dept", Supplier 1=Farnell
H2: library part JA_HDR_IDC_5X2_VERT, "IDC Header, 2,54mm, 10-Pin, Vert", Supplier Part Number 1=1096985, Storage Location="ECE Dept Store", Supplier="ECE Dept", Supplier 1=Farnell
H3 H4 H6: "3Pin Header 2.54mm spacing"
H5: "IDC Header, 2.54mm, 8-Pin, Vert", Colour=Blue, Current Rating=3A, Manufacturer="Amphenol FCI", Manufacturer Part Number=75869-132LF, Max Operating Temperature=125°C, Max Voltage Rating (AC)=500V, Min Operating Temperature=-65°C, Package Quantity=100, Supplier Part Number 1=609-3530-ND, ComponentLink1Description=http://uk.rs-online.com/webdocs/13ec/0900766b813ecbbf.pdf, ComponentLink1URL=http://uk.rs-online.com/webdocs/13ec/0900766b813ecbbf.pdf, ComponentLink2Description=https://cdn.amphenol-icc.com/media/wysiwyg/files/drawing/75869.pdf, ComponentLink2URL=https://cdn.amphenol-icc.com/media/wysiwyg/files/drawing/75869.pdf, ComponentLink3Description=http://portal.fciconnect.com/Comergent/fci/drawing/75869.pdf, ComponentLink3URL=http://portal.fciconnect.com/Comergent/fci/drawing/75869.pdf, ComponentLink4Description=http://portal.fciconnect.com/Comergent//fci/drawing/75869.pdf, ComponentLink4URL=http://portal.fciconnect.com/Comergent//fci/drawing/75869.pdf, Connector Type="Male Pin", Contact Material=Bronze, Contact Mating Length=0.236inch, Contact Plating=Gold,GXT, Depth=9.55mm, Gender=Male, Housing Colour=Blue, Housing Material=Thermoplastic, Lead Free="Lead Free", Length=17.37mm, Mating Post Length=6mm, Mount="Through Hole", Number of Contacts=8, Number of Positions=8, Number of Rows=2, Orientation=Straight, Packaging=Rail/Tube, Pitch=2.54mm, Pricing 1="1=0.76, 10=0.668, 100=0.5766, 500=0.47178, 1000=0.41936, 5000=0.36694, 10000=0.34859 (USD)", Radiation Hardening=No, REACH SVHC="No SVHC", Row Spacing=0.1inch, Stock 1=8776, Supplier 1=Digi-Key, Termination=Solder, Termination Post Length=3.05mm, Voltage Rating=500V
H7: library part JA_MOLEX_KK_10POS, "CONN HEADER 10POS 2.54mm VERT_ Thru Hole", Supplier Part Number 1=1756828, Storage Location="ECE Dept Store", Supplier="ECE Dept", Supplier 1=Farnell
H8: "Header, 2-Pin", LatestRevisionDate=17-Jul-2002, LatestRevisionNote="Re-released for DXP Platform.", Publisher="Altium Limited"
J1 J2: library part TP_JUMPER, "2.54mm Jumper Thru Hole", Supplier Part Number 1=1097975, No. of Positions=2, No. of Rows=1, Pitch Spacing=2.54, Storage Location="ECE$ Store", Supplier="ECE Dept", Supplier 1=Farnell
L1 L3: library part IN_Ferrite-Bead, "Ferrite Bead, Rdc 0.3R, Z100MHZ 600R, Imax 1A, SMD 1206", DC Current Rating=1, DC Resistance Max=0.08, Ferrite Case Style="1206 ^3216 Metric]", Frequency Range="50MHz to 1", Impedance Tolerance="± 25%", Manufacturer=FAIR-RITE, Manufacturer Part Number=2512066017Y1, Supplier Part Number 1=1612060, Ferrite Mounting=SMD, Impedance=600, Manufacturer PN=2512066017Y1, Storage Location="PCB Assembly WS", Supplier="ECE Dept", Supplier 1=Farnell
L2: library part CDRH104RNP-5R2NC, "FIXED IND 5.2UH 6A 22 MOHM SMD", Current - Saturation=5.6A, DC Resistance (DCR)="22 mOhm Max", Frequency - Self Resonant=-, Manufacturer="Sumida America Components Inc.", Operating Temperature="-40°C ~ 100°C", Package / Case=Nonstandard, Supplier Part Number 1=308-2280-1-ND, Tolerance=±30%, Category="Inductors, Coils, Chokes", ComponentLink1Description=http://products.sumida.com/products/pdf/CDRH104R.pdf, ComponentLink1URL=http://products.sumida.com/products/pdf/CDRH104R.pdf, Height - Seated (Max)="0.157\" (4.00mm)", Manufacturer Part Number=CDRH104RNP-5R2NC, Material - Core=Ferrite, Mounting Type="Surface Mount", Packaging="Cut Tape (CT)", Part Status=Active, Pricing 1="1=2.9, 10=2.678, 100=1.8743, 500=1.5173 (NZD)", Q @ Freq=-, Ratings=-, RoHS="RoHS Compliant", Shielding=Shielded, Size / Dimension="0.402\" L x 0.394\" W (10.20mm x 10.00mm)", Stock 1=3849, Supplier 1=Digi-Key, Supplier Device Package=-, Type=-
Q1: library part TM_SSM3J328R, "MOSFET P-CH 20V 6A SOT23-3", Case/Package=SOT-23-3, Continuous Drain Current (ID)=6A, Drain to Source Breakdown Voltage=-20V, Drain to Source Resistance=47.4mR, Drain to Source Voltage (Vdss)=20V, Gate to Source Voltage (Vgs)=8V, Input Capacitance=840pF, Input Capacitance (Ciss) @ Vds="840pF @ 10V", Manufacturer=Toshiba, Manufacturer Part Number=SSM3J328R,LF, Max Operating Temperature=150°C, Max Power Dissipation=1W, Min Operating Temperature=-55°C, Package / Case="SOT-23-3 Flat Leads", Package Quantity=3000, Power Dissipation=2W, Supplier Device Package=SOT-23F, Supplier Part Number=SSM3J328RLFDKR-ND, ComponentLink1Description=https://datasheet.ciiva.com/11158/ssm3j328r-datasheet-en-20140301-11158652.pdf, ComponentLink1URL=https://datasheet.ciiva.com/11158/ssm3j328r-datasheet-en-20140301-11158652.pdf, Current - Continuous Drain (Id) @ 25° C=6A, Element Configuration=Single, FET Feature="Logic Level Gate, 1.5V Drive", FET Type="MOSFET P-Channel, Metal Oxide", Gate Charge (Qg) @ Vgs="12.8nC @ 4.5V", Mount="Surface Mount", Number of Channels=1, Number of Elements=1, Number of Pins=3, Packaging="Tape and Reel", Power - Max=1W, Pricing="1=0.79, 10=0.658, 25=0.5772, 100=0.4939, 250=0.42836, 500=0.36284, 1000=0.27972 (NZD)", Radiation Hardening=No, Rds On Max=29.8mR, Storage Location="PCB Assembly WS", Supplier=Digi-Key, Supplier 1=Digi-Key, Supplier Part Number 1=SSM3J328RLFDKR-ND, Turn-Off Delay Time=107ns, Turn-On Delay Time=32ns, Vgs(th) (Max) @ Id="1V @ 1mA"
R1: library part RS_27K, "RES 27K OHM 1/10W 5% 0603 SMD", Storage Location="PCB Assembly WS", Supplier="ECE Dept"
R2: library part RS_47K, "RES 47.0K OHM 1/10W 5% 0603 SMD", Storage Location="PCB Assembly WS", Supplier="ECE Dept"
R3 R4: library part RS_27R, "RES 27 OHM 1/10W 5% 0603 SMD", Storage Location="PCB Assembly WS", Supplier="ECE Dept"
R5 R20: library part RS_1K, "RES 1.0K OHM 1/10W 5% 0603 SMD", Storage Location="PCB Assembly WS", Supplier="ECE Dept"
R6: library part RS_1K6, "RES 1.6K OHM 1/10W 5% 0603 SMD", Storage Location="PCB Assembly WS", Supplier="ECE Dept"
R7: library part RT_1R, "RES 1R OHM 1/4W 5% 1206 SMD", Storage Location="PCB Assembly WS", Supplier="ECE Dept"
R8: library part RS_100K, "RES 100K OHM 1/10W 5% 0603 SMD", Storage Location="PCB Assembly WS", Supplier="ECE Dept"
R9: library part RS_16K, "RES 16K OHM 1/10W 5% 0603 SMD", Storage Location="PCB Assembly WS", Supplier="ECE Dept"
R10 R11: library part RS_10K, "RES 10.0K OHM 1/10W 5% 0603 SMD", Storage Location="PCB Assembly WS", Supplier="ECE Dept"
R12 R13 R14 R18 R24 R25 R26: library part RS_3K, "RES 3K OHM 1/10W 5% 0603 SMD", Storage Location="PCB Assembly WS", Supplier="ECE Dept"
R15 R16 R17 R19 R23 R27 R28 R29 R31 R32 R33 R34 R35: library part RS_0R0, "RES 0.0 OHM 1/10W 5% 0603 SMD", Storage Location="PCB Assembly WS", Supplier="ECE Dept"
R21 R22 R30: library part RS_4K7, "RES 4.7K OHM 1/10W 5% 0603 SMD", Storage Location="PCB Assembly WS", Supplier="ECE Dept"
S1 S2: library part WS_EVQPNF05M, "Panasonic 6 x 3.5mm SMD Light Touch Switch Type SMD", Manufacturer=Panasonic, Supplier Part Number 1=2079481, Manufacturer PN=EVQPNF05M, PackageDescription="6.0 x 3.5 mm", Storage Location="PCB Assembly WS", Supplier="ECE Dept", Supplier 1=Farnell, Supplier 2=Digi-Key, Supplier Part Number 2=P13598SCT-ND
S3: "DIP Switch, 4 Position, SPST SMD", Contact Current DC Max=25, Manufacturer="OMRON ELECTRONIC COMPONENTS", Manufacturer Part Number=A6SN-4101, Supplier Part Number 1=2029425, Contact Configuration=SPST, External Length / Height=12.1, No. of Switch Positions=4, Pitch Spacing=2.54, Storage Location="PCB Assembly WS", Supplier="ECE Dept", Supplier 1=Farnell
T1: library part TM_BSH105, "MOSFET N-CH 20V 1.05A SOT-23", Current - Continuous Drain (Id) @ 25° C=1.05A, Drain to Source Voltage (Vdss)=20V, Input Capacitance (Ciss) @ Vds="152pF @ 16V", Manufacturer="NXP Semiconductors", Manufacturer Part Number=BSH105,215, Package / Case="TO-236-3, SC-59, SOT-23-3", Power - Max=417mW, Supplier Part Number 1=1758066, FET Type="MOSFET N-Channel, Metal Oxide", Gate Charge (Qg) @ Vgs="3.9nC @ 4.5V", Pricing="1=0.53, 10=0.42, 25=0.3544, 100=0.2885, 250=0.23896, 500=0.1974, 1000=0.14785 (NZD)", Rds On (Max) @ Id, Vgs="200 mOhm @ 600mA, 4.5V", Storage Location="PCB Assembly WS", Supplier="ECE Dept", Supplier 1=Farnell, Supplier 2=Digi-Key, Supplier Part Number 2=568-6215-1-ND
U1: library part SE_ATSAM4S16BA-MU, "IC MCU 32BIT 512KB FLASH 64LQFP", Manufacturer=Atmel, Package / Case=64-LQFP, Supplier Part Number 1=ATSAM4S8BA-ANRCT-ND, Voltage - Supply (Vcc/Vdd)="1.62 V ~ 3.6 V", Code_JEDEC=MO-220VMMD-3, ComponentLink1Description="Manufacturer URL", ComponentLink1URL=http://www.atmel.com/, ComponentLink2Description="SAM4S Series Datasheet", ComponentLink2URL=http://www.atmel.com/dyn/resources/prod_documents/11100.pdf, ComponentLink3Description="SAM4S Series Summary", ComponentLink3URL=http://www.atmel.com/dyn/resources/prod_documents/11100S.pdf, Connectivity="I²C, IrDA, Memory Card, SPI, SSC, UART/USART, USB", Core Processor="ARM® Cortex®-M4", Core Size=32-Bit, Data Converters="A/D 11x12b, D/A 2x12b", Manufacturer Part Number=ATSAM4S8BA-ANR, Number of I/O=47, PackageDescription="64-Pin Quad Flat No-Lead (QFN) Sawn, 9 x 9 x 1.0 mm Body, 0.5 mm Pitch, Exposed Pad", PackageReference=64PS, PackageVersion="revJ, Jul-2007", Packaging="Cut Tape (CT)", Peripherals="Brown-out Detect/Reset, DMA, POR, PWM, WDT", Program Memory Size="512KB (512K x 8)", Program Memory Type=FLASH, RAM Size="128K x 8", Speed=120MHz, Supplier 1=Digi-Key
U2 U7: library part SV_CAT6219-330TDGT3, "IC REG LIN 3.3V 500MA TSOT23-5", Base Part Number=CAT6219, Current - Output=500mA, Manufacturer Part Number=CAT6219-330TDGT3, Package / Case="SOT-23-5 Thin, TSOT-23-5", Supplier Device Package=TSOT-23-5, Supplier Part Number=CAT6219-330TDGT3CT-ND, Voltage - Input (Max)=5.5V, Voltage - Output (Min/Fixed)=3.3V, Voltage Dropout (Max)="0.5V @ 500mA", ComponentLink1Description=http://www.onsemi.com/pub/Collateral/CAT6219-D.PDF, ComponentLink1URL=http://www.onsemi.com/pub/Collateral/CAT6219-D.PDF, Supplier=Digi-Key, Supplier 1=Digi-Key
U3: library part ADP2302ARDZ-5.0-R7, "IC REG BUCK 5V 2A 8SOIC", Current - Output=2A, Frequency - Switching=700kHz, Supplier Part Number 1=ADP2302ARDZ-5.0-R7CT-ND, Voltage - Input (Max)=20V, Voltage - Output (Min/Fixed)=5V, Manufacturer_Part_Number=ADP2302ARDZ-5.0-R7, Output Type=Fixed, Supplier 1=Digi-Key, Type=DEV, Vendor="Analog Devices Inc"
U4 U5: "1.8V - 5V level converter"
U6: library part NRF24, "nRF24 SMD Module", Warning="No power planes near or under device"
U8: "9 axis IMU"
VR1: "JOYSTICK 10K OHM 2 AXIS TH", Manufacturer 1=SparkFun, Manufacturer Part Number 1=COM-09032, Supplier Part Number 1=1568-1526-ND, ComponentLink1Description=https://media.digikey.com/pdf/Data%20Sheets/Sparkfun%20PDFs/COM-09032_Web.pdf?src-supplier=Digi-Key, ComponentLink1URL=https://media.digikey.com/pdf/Data%20Sheets/Sparkfun%20PDFs/COM-09032_Web.pdf?src-supplier=Digi-Key, Pricing 1="1=3.95000 (USD)", RoHS=No, Stock 1=563, Supplier 1=Digi-Key
Y1: library part XT_CRYSTAL_12MHz_18pF, "CRYSTAL 12MHZ 18PF 6X3.5mm SMD", ESR (Equivalent Series Resistance)="60 Ohm", Frequency Stability=±50ppm, Frequency Tolerance=±30ppm, Load Capacitance=18pF, Manufacturer="CTS-Frequency Controls", Manufacturer Part Number=406C35D12M00000, Operating Mode=Fundamental, Operating Temperature="-20°C ~ 70°C", Package / Case="4-SMD, No Lead (DFN, LCC)", Supplier Part Number 1=CTX855CT-ND, Frequency=12MHz, Height="0.047\" (1.20mm)", Mounting Type="Surface Mount", Size / Dimension="0.236\" L x 0.138\" W (6.00mm x 3.50mm)", Supplier 1=Digi-Key

## Via types
v1: diameter 1, hole 0.5, Top Side to Bottom Side, 103 vias
v2: diameter 1, hole 0.5, Top Side to Bottom Side, tented top, 9 vias
v3: diameter 1.27, hole 0.5, Top Side to Bottom Side, 3 vias
v4: diameter 1.27, hole 0.711, Top Side to Bottom Side, 2 vias
v5: diameter 0.6, hole 0.3, Top Side to Bottom Side, 2 vias
v6: diameter 0.6, hole 0.3, Top Side to Bottom Side, tented both sides, 1 vias
v7: diameter 1, hole 0.5, Top Side to Bottom Side, tented both sides, 1 vias
v8: diameter 1.3, hole 1.1, Top Side to Bottom Side, 1 vias
v9: diameter 2, hole 1.5, Top Side to Bottom Side, 1 vias

## Nets (pads, with @x,y where several pads share a name; then routed paths per layer and width w, separated by ;. In a path a pad name is that pad's centre, name@x,y a point inside that pad or via, vN(x,y) a via of type N, cw(c..) or ccw(c..) an arc to the next point about the centre after c; other vN are vias at no path point)
3V3: 3V3.1 3V3_ERASE.1 C5.2 C7.2 C9.2 C11.2 C13.2 C31.2 DL1.2 DL2.2 H7.9 R15.1 R17.2 R21.2 R22.2 R23.2 R27.1 R32.2 R33.2 R35.2 S3.5 S3.6 U1.1 U1.7 U1.18 U1.45 U1.58 U8.22 | length 83.3
  Top Side w0.2: 40.675,36.179 40.675,35.85 41.39,35.135 U8.22@42.843,35.135
  Top Side w0.3: R32.2@6.8,34.95 11.164,34.95 15.139,38.925 18.675,38.925 v1(19.375,39.625) ; R27.1@14.05,34 14.05,34.1 15.196,35.246 18.146,35.246 v1(19.225,36.325) ; DL2.2@22.025,48.1 22,48.075 22,47.125 22.35,46.775 v1(23.125,46.775) 23.825,46.775 24.225,47.175 DL1.2@24.225,48.1 ; C7.2@25.25,64.425 25.025,64.2 25.025,63.568 25.343,63.25 U1.18@26.475,63.25 ; U1.7@32.75,65.525 32.75,63.85 v1(32.769,63.831) ; U1.45@34.25,54.475 34.25,52.9 C9.2@34.425,52.725 36.45,50.7 v1(36.95,50.7) ; v1(35.325,60.55) 35.649,60.55 35.849,60.75 U1.58@37.525,60.75 ; C13.2@35.65,67.3 35.725,67.225 35.725,65.55 U1.1@35.75,65.525 ; C13.2@35.7,67.35 35.775,67.425 35.775,68.625 v1(35.85,68.7) ; v1(40.3,37.725) 40.3,36.554 40.675,36.179 ; v6(41.875,74.294) 41.875,74.125 42.425,73.575 R23.2@42.425,72.375 ; v1@45.125,46 v1(45.2,45.925) ; C31.2@47.2,19.85 C31.2@47.25,19.9 C31.2@47.725,19.9 ; 3V3.1@47.2,24.7 3V3.1@47.25,24.65 ; v1@49.907,22.557 v1(49.939,22.589) ; R35.2@53.175,2.975 R35.2@53.2,3
  Top Side w0.5: v1(35.7,35.5) 35.719,35.481 35.719,35.231 36.4,34.55 37.275,34.55 37.375,34.45 R21.2@37.375,34.35 ; v1@35.871,35.646 37.275,35.646 37.375,35.746 R22.2@37.375,35.8 ; v1(50.675,40.8) 50.675,39.05 R17.2@50.725,39
  Top Side w0.762: v1(22.875,65.95) 22.939,65.95 24.058,64.831 24.088,64.831 24.475,64.444 25.206,64.444 C7.2@25.225,64.425 C7.2@25.25,64.425
  Top Side w0.8: v1(51,2.975) 51.013,2.988 53.162,2.988 R35.2@53.175,2.975
  Top Side w0.85: R33.2@6.95,48.375 6.95,49.725 7.9,50.675 10.375,50.675 11.35,51.65 v1(18.7,51.65)
  Top Side w1: R15.1@13.9,46.7 v1(18.85,46.7) ; 3V3_ERASE.1@42.05,46 v1@45.125,46
  Bottom Side w0.3: C11.2@35.7,61.9 C11.2@35.731,61.869
  Bottom Side w0.5: C5.2@31.4,63.525 31.475,63.6 32.365,63.6 32.54,63.775 v1@32.675,63.775
  Bottom Side w0.508: v1(35.325,60.55) 35.325,60.683 35.554,60.912 35.554,61.704 35.719,61.869 C11.2@35.731,61.869
  other v1: 45.625,22.6 47.448,22.598
3V3_PROG: H2.7 H2.8 S3.4 | length 3.9
  Top Side w1: S3.4@48.3,7.96 S3.4@48.34,8 49.8,8 v1(49.95,7.85) ; v1(48.4,5.725) S3.4@48.4,7.86
3V3_RADIO: L3.2 R19.2 R34.2 | length 6.5
  Top Side w0.8: R34.2@1.575,66.05 R34.2@1.625,66 ; L3.2@1.65,63.2 L3.2@1.65,63.575 ; R19.2@2.6,69.775 2.612,69.788 4.737,69.788 v1(4.75,69.8)
  Top Side w1.5: R34.2@1.625,66 1.625,63.6 L3.2@1.65,63.575 ; v1(1.8,61.6) L3.2@1.8,63.1
3V3_REG: 3V3_REG.1 C33.2 S3.3 U2.5 | length 0.2
  Top Side w0.3: S3.3@45.8,8 S3.3@45.975,7.825
5V: 5V.1 C1.2 C2.2 C21.2 C22.2 C26.2 C27.2 C32.2 H4.1 H6.1 R16.2 R28.2 R31.1 S3.7 S3.8 U2.1 U2.3 U7.1 | length 10.8
  Top Side w0.3: H4.1@2.7,53.64 H4.1@2.9,53.44 H4.1@2.915,53.425 ; v1@7.283,42.7 7.316,42.666 v1(7.35,42.7) ; C26.2@10.15,59.05 C26.2@10.2,59 ; 5V.1@41.8,24.8 5V.1@41.85,24.75
  Top Side w0.5: v1(33.425,12) 33.521,11.904 33.521,10.769 34.1,10.19 34.1,9.525 35.05,8.575 R31.1@35.15,8.575 ; U2.3@34.6,14.75 U2.3@34.65,14.8 ; C1.2@36.475,16.2 36.5,16.175 U2.1@36.5,14.75
  Top Side w0.8: v1(3.15,30.65) 3.9,29.9 R28.2@6.85,29.9
  Top Side w1: C21.2@6.813,53.425 C21.2@7.155,53.767
  other v1: 43.15,22.55 38.527,22.577 40.723,22.577 8.775,37.65 10.025,43.8 4.975,51.7
  other v2: 9.7,56.825
5V_BUCK: 5V_BUCK.1 C18.2 C19.2 C23.2 C24.2 L2.2 S3.1 U3.5 | length 10
  Top Side w0.3: L2.2@10.1,26.8 L2.2@10.475,26.425 ; C24.2@14.6,28.8 C24.2@14.7,28.9 ; U3.5@16.594,27.5 U3.5@16.689,27.405 ; C19.2@16.689,29.939 C19.2@16.8,30.05 ; C18.2@20.025,30.05 C18.2@20.075,30.1
  Top Side w0.8: C23.2@12.225,28.8 14.55,28.8 C24.2@14.65,28.9 ; 5V_BUCK.1@25.3,3.1 25.35,3.15 v1(25.35,5.475) ; v1(39.475,6.85) 39.513,6.888 39.608,6.888 39.82,7.1 40.52,7.1 40.72,7.3 S3.1@40.72,8
  Top Side w1: v1(10.475,24.425) L2.2@10.475,26.425
D_N: H1.2 R4.1 | length 12.7
  Top Side w0.381: R4.1@43.6,57.675 43.6,57.775 48.042,57.775 50.135,55.682 54.224,55.682 54.247,55.659 55.266,55.659 H1.2@55.325,55.6
D_P: H1.3 R3.1 | length 13.3
  Top Side w0.381: R3.1@43.35,59.25 43.35,59.15 47.565,59.15 50.398,56.317 54.224,56.317 54.247,56.34 55.266,56.34 H1.3@55.325,56.4